# Allegro board PMOD2BNCSIMPLE_v1_04.brd
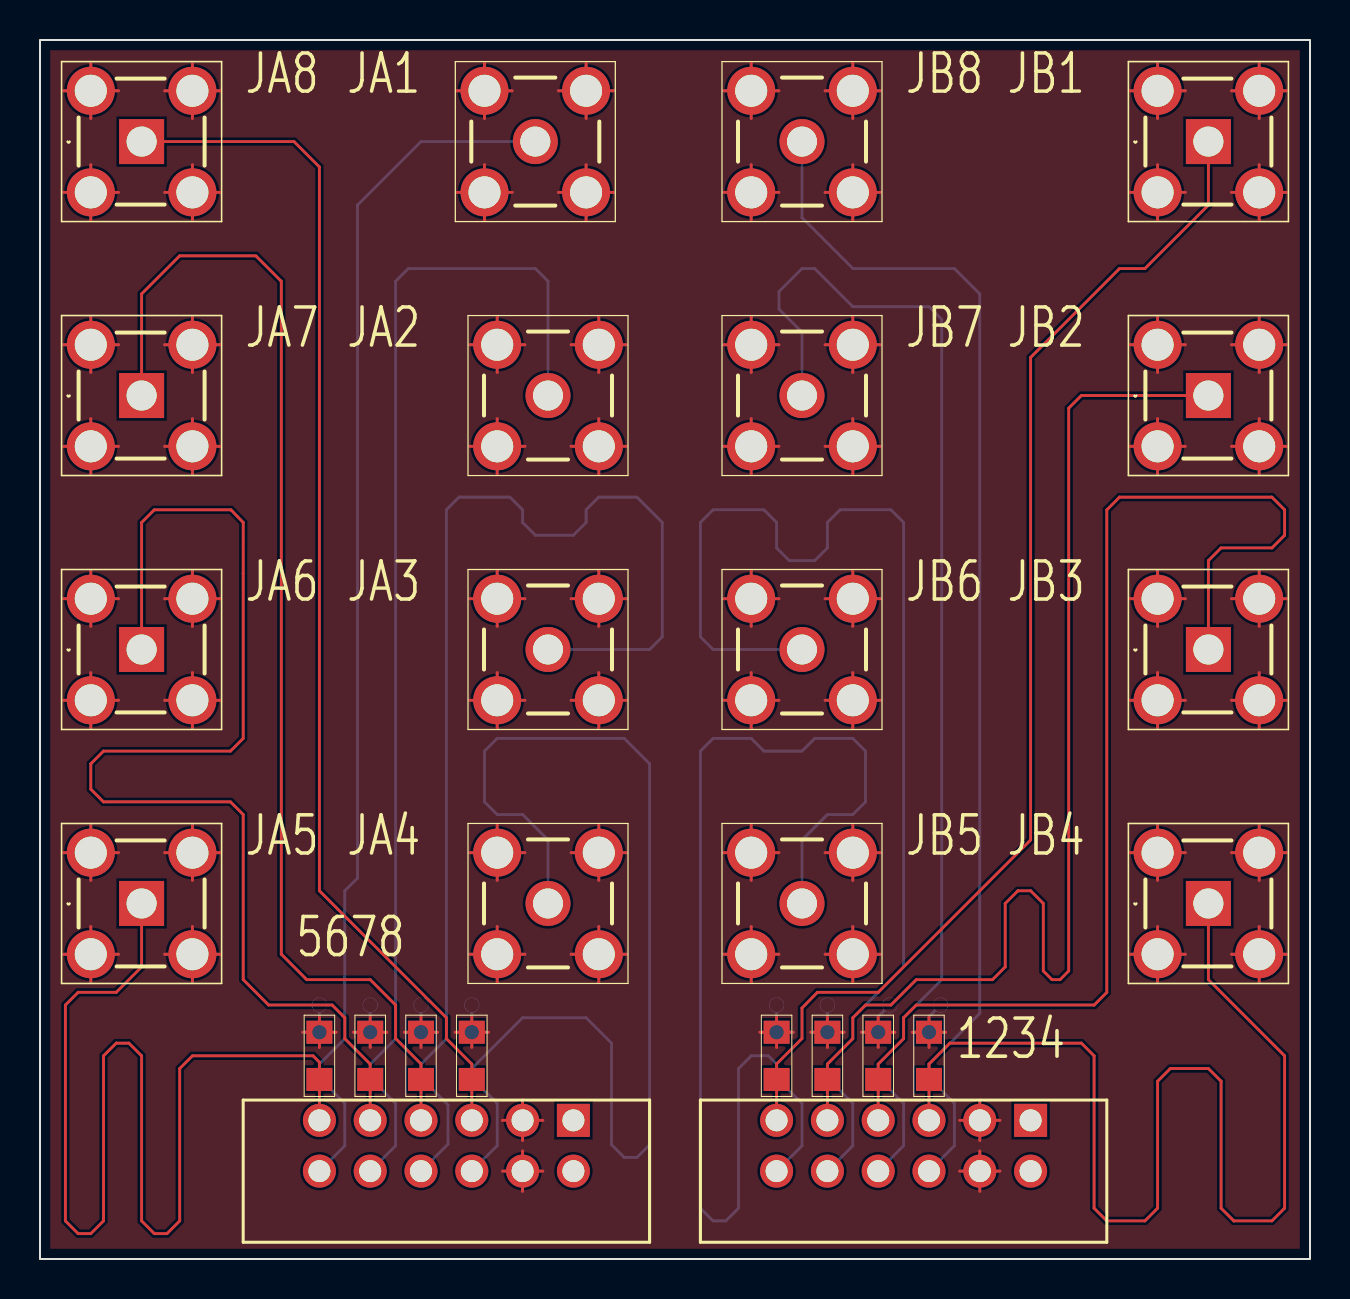
[diagram p0: board, top side]
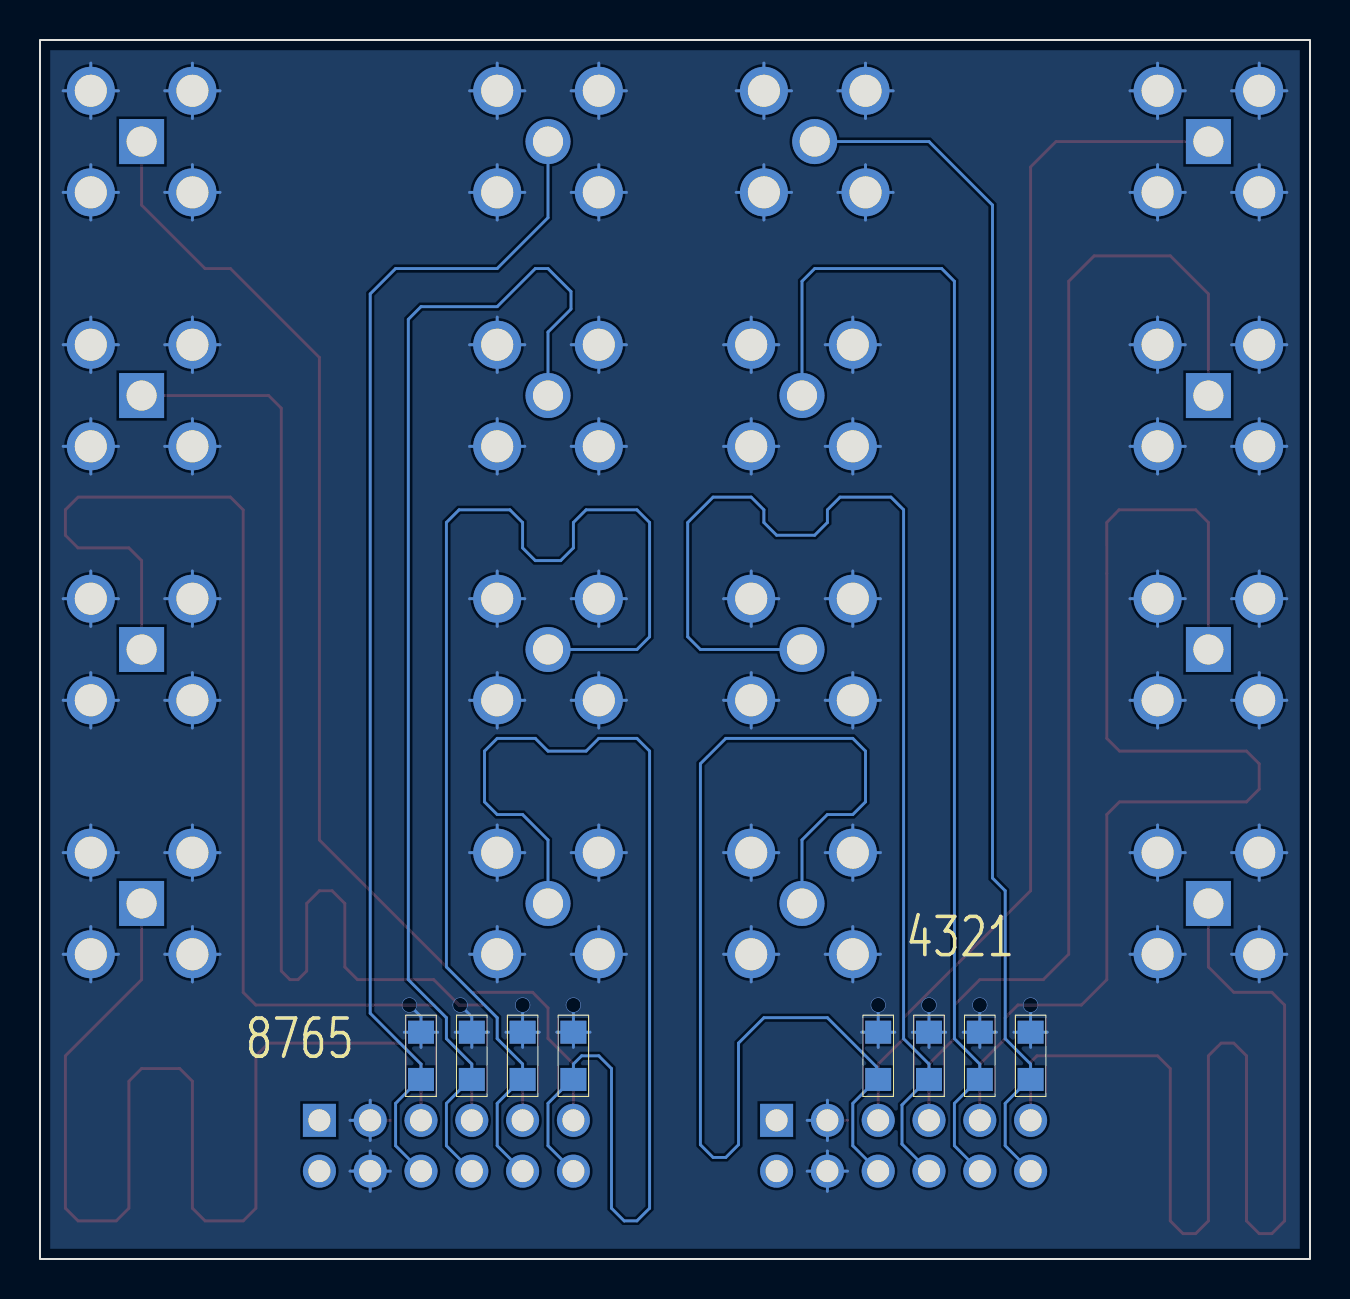
[diagram p1: board, bottom side, seen from below]

Outline 63.5 x 60.96 mm; copper layers: TOP, GND1, GND2, BOTTOM. Coordinates in mm from the lower left corner of the outline.
Outline path: rectangle 0,0 63.5,60.96

## Placement (name value [footprint] x y rotation side)
J1  71764_0114  [717640112]  10.16 0.84 180 top
J2  71764_0114  [717640112]  33.02 0.84 180 top
R1  -  [RES_0805]  21.59 10.16 90 top
R2  -  [RES_0805]  19.05 10.16 90 top
R3  -  [RES_0805]  16.51 10.16 90 top
R4  -  [RES_0805]  13.97 10.16 90 top
R5  -  [RES_0805]  13.97 10.16 90 bottom
R6  -  [RES_0805]  16.51 10.16 90 bottom
R7  -  [RES_0805]  19.05 10.16 90 bottom
R8  -  [RES_0805]  21.59 10.16 90 bottom
R9  -  [RES_0805]  44.45 10.16 90 top
R10  -  [RES_0805]  41.91 10.16 90 top
R11  -  [RES_0805]  39.37 10.16 90 top
R12  -  [RES_0805]  36.83 10.16 90 top
R13  -  [RES_0805]  36.83 10.16 90 bottom
R14  -  [RES_0805]  39.37 10.16 90 bottom
R15  -  [RES_0805]  41.91 10.16 90 bottom
R16  -  [RES_0805]  44.45 10.16 90 bottom
U1  -  [SMA-R-RA]  5.08 17.78 0 top
U2  -  [SMAFST_PCBN]  24.77 55.88 0 top
U3  -  [SMA-R-RA]  5.08 30.48 0 top
U4  -  [SMAFST_PCBN]  25.4 43.18 0 top
U5  -  [SMA-R-RA]  5.08 43.18 0 top
U6  -  [SMAFST_PCBN]  25.4 30.48 0 top
U7  -  [SMA-R-RA]  5.08 55.88 0 top
U8  -  [SMAFST_PCBN]  25.4 17.78 0 top
U9  -  [SMA-R-RA]  58.42 55.88 0 top
U10  -  [SMAFST_PCBN]  38.1 17.78 0 top
U11  -  [SMA-R-RA]  58.42 43.18 0 top
U12  -  [SMAFST_PCBN]  38.1 30.48 0 top
U13  -  [SMA-R-RA]  58.42 30.48 0 top
U14  -  [SMAFST_PCBN]  38.1 43.18 0 top
U15  -  [SMA-R-RA]  58.42 17.78 0 top
U16  -  [SMAFST_PCBN]  38.1 55.88 0 top

## Library data of the parts
J1 J2 = 71764_0114
R1-R16 = RES_0805
U1 U3 U5 U7 U9 U11 U13 U15 = SMA-R-RA
U2 U4 U6 U8 U10 U12 U14 U16 = SMAFST_PCBN

## Footprints (pads in the part's own frame, mm; a bottom-side part is the same pattern mirrored in y, then rotated)
717640112
  rect 1.651x1.651 hole 1.1: 1(-16.51,-6.096)
  round 1.651 hole 1.1: 2(-16.51,-3.556) 3(-13.97,-6.096) 4(-13.97,-3.556) 5(-11.43,-6.096) 6(-11.43,-3.556) 7(-8.89,-6.096) 8(-8.89,-3.556) 9(-6.35,-6.096) 10(-6.35,-3.556) 11(-3.81,-6.096) 12(-3.81,-3.556)
RES_0805
  rect 1.151x1.3 smd: 1(1.181,0) 2(-1.181,0)
SMA-R-RA
  rect 2.25x2.25 hole 1.501: 1(0,0)
  round 2.4 hole 1.6: 2(-2.54,2.54) 3(-2.54,-2.54) 4(2.54,-2.54) 5(2.54,2.54)
SMAFST_PCBN
  round 2.25 hole 1.501: 1(0,0)
  round 2.4 hole 1.6: 2(-2.54,-2.54) 3(2.54,-2.54) 4(2.54,2.54) 5(-2.54,2.54)

## Nets
GND: J1.3 J1.4 J2.3 J2.4 R1.1 R2.1 R3.1 R4.1 R5.1 R6.1 R7.1 R8.1 R9.1 R10.1 R11.1 R12.1 R13.1 R14.1 R15.1 R16.1 U1.2 U1.3 U1.4 U1.5 U2.2 U2.3 U2.4 U2.5 U3.2 U3.3 U3.4 U3.5 U4.2 U4.3 U4.4 U4.5 U5.2 U5.3 U5.4 U5.5 U6.2 U6.3 U6.4 U6.5 U7.2 U7.3 U7.4 U7.5 U8.2 U8.3 U8.4 U8.5 U9.2 U9.3 U9.4 U9.5 U10.2 U10.3 U10.4 U10.5 U11.2 U11.3 U11.4 U11.5 U12.2 U12.3 U12.4 U12.5 U13.2 U13.3 U13.4 U13.5 U14.2 U14.3 U14.4 U14.5 U15.2 U15.3 U15.4 U15.5 U16.2 U16.3 U16.4 U16.5
N17882: J1.11 R4.2 U1.1
N17894: J1.9 R3.2 U3.1
N17906: J1.7 R2.2 U5.1
N17918: J1.5 R1.2 U7.1
N17930: J1.12 R5.2 U2.1
N17948: J1.10 R6.2 U4.1
N17973: J1.8 R7.2 U6.1
N17998: J1.6 R8.2 U8.1
N19655: J2.11 R12.2 U9.1
N19661: J2.9 R11.2 U11.1
N19667: J2.7 R10.2 U13.1
N19673: J2.5 R9.2 U15.1
N19679: J2.12 R13.2 U10.1
N19687: J2.10 R14.2 U12.1
N19697: J2.8 R15.2 U14.1
N19707: J2.6 R16.2 U16.1

Pads without a net: J1 1 2; J2 1 2

## Via types
v1: diameter 0.762, hole 0.711, TOP to GND1, 8 vias
v2: diameter 0.762, hole 0.711, GND2 to BOTTOM, 8 vias

## Routing (per net, layer and track width the routed paths; a pad name or vN(x,y) marks a point on that pad's centre or on a via; arc(x,y) is an arc through that point)
GND: length 1536.3
  TOP w0.145: 1.16,53.34 U7.3 ; U7.3 3.92,53.34 ; U7.3 2.54,51.96 ; U7.3 2.54,54.72 ; U9.3 55.88,54.72 ; U9.3 54.5,53.34 ; U9.3 57.26,53.34 ; U9.3 55.88,51.96 ; U8.2 24.24,15.24 ; U8.2 21.48,15.24 ; U8.2 22.86,13.86 ; U8.2 22.86,16.62 ; U4.2 24.24,40.64 ; U4.2 22.86,42.02 ; U4.2 22.86,39.26 ; U4.2 21.48,40.64 ; 60.96,44.34 U11.5 ; U11.5 62.34,45.72 ; U11.5 60.96,47.1 ; U11.5 59.58,45.72 ; U9.5 62.34,58.42 ; U9.5 59.58,58.42 ; U9.5 60.96,57.04 ; U9.5 60.96,59.8 ; 34.18,40.64 U14.2 ; U14.2 35.56,42.02 ; U14.2 35.56,39.26 ; U14.2 36.94,40.64 ; 7.62,18.94 U1.5 ; U1.5 9,20.32 ; U1.5 7.62,21.7 ; U1.5 6.24,20.32 ; U2.5 23.61,58.42 ; U2.5 22.23,57.04 ; U2.5 20.84,58.42 ; U2.5 22.23,59.8 ; 54.5,20.32 U15.2 ; U15.2 55.88,21.7 ; U15.2 55.88,18.94 ; U15.2 57.26,20.32 ; 19.05,10.58 v1(19.05,11.34) ; v1(19.05,11.34) 19.05,12.1 ; v1(19.05,11.34) 18.22,11.34 ; v1(19.05,11.34) 19.88,11.34 ; v1(21.59,11.34) 21.59,12.1 ; v1(21.59,11.34) 22.42,11.34 ; v1(21.59,11.34) 21.59,10.58 ; v1(21.59,11.34) 20.76,11.34 ; 20.84,53.34 U2.2 ; U2.2 22.23,54.72 ; U2.2 23.61,53.34 ; U2.2 22.23,51.96 ; U5.4 7.62,42.02 ; U5.4 9,40.64 ; U5.4 6.24,40.64 ; U5.4 7.62,39.26 ; 54.5,33.02 U13.2 ; U13.2 55.88,34.4 ; U13.2 55.88,31.64 ; U13.2 57.26,33.02 ; U13.4 60.96,29.32 ; U13.4 59.58,27.94 ; U13.4 60.96,26.56 ; U13.4 62.34,27.94 ; 27.94,31.64 U6.4 ; U6.4 27.94,34.4 ; U6.4 29.32,33.02 ; U6.4 26.56,33.02 ; 7.62,51.96 U7.4 ; U7.4 6.24,53.34 ; U7.4 7.62,54.72 ; U7.4 9,53.34 ; 27.3,51.96 U2.3 ; U2.3 25.92,53.34 ; U2.3 28.69,53.34 ; U2.3 27.3,54.72 ; U3.3 2.54,29.32 ; U3.3 3.92,27.94 ; U3.3 2.54,26.56 ; U3.3 1.16,27.94 ; 40.64,31.64 U12.4 ; U12.4 40.64,34.4 ; U12.4 39.26,33.02 ; U12.4 42.02,33.02 ; 39.26,45.72 U14.4 ; U14.4 42.02,45.72 ; U14.4 40.64,44.34 ; U14.4 40.64,47.1 ; 40.64,39.26 U14.3 ; U14.3 39.26,40.64 ; U14.3 42.02,40.64 ; U14.3 40.64,42.02 ; U6.2 22.86,29.32 ; U6.2 24.24,27.94 ; U6.2 21.48,27.94 ; U6.2 22.86,26.56 ; U9.4 62.34,53.34 ; U9.4 59.58,53.34 ; U9.4 60.96,51.96 ; U9.4 60.96,54.72 ; 54.5,58.42 U9.2 ; U9.2 57.26,58.42 ; U9.2 55.88,59.8 ; U9.2 55.88,57.04 ; U10.2 36.94,15.24 ; U10.2 35.56,16.62 ; U10.2 35.56,13.86 ; U10.2 34.18,15.24 ; U15.5 60.96,21.7 ; U15.5 62.34,20.32 ; U15.5 60.96,18.94 ; U15.5 59.58,20.32 ; U16.3 40.64,54.72 ; U16.3 42.02,53.34 ; U16.3 39.26,53.34 ; U16.3 40.64,51.96 ; 1.16,20.32 U1.2 ; U1.2 2.54,21.7 ; U1.2 2.54,18.94 ; U1.2 3.92,20.32 ; U8.4 29.32,20.32 ; U8.4 27.94,21.7 ; U8.4 27.94,18.94 ; U8.4 26.56,20.32 ; J2.3 46.99,7.94 ; J2.3 45.98,6.93 ; J2.3 48,6.93 ; J2.3 46.99,5.93 ; 39.26,15.24 U10.3 ; U10.3 40.64,13.86 ; U10.3 40.64,16.62 ; U10.3 42.02,15.24 ; 27.94,13.86 U8.3 ; U8.3 29.32,15.24 ; U8.3 27.94,16.62 ; U8.3 26.56,15.24 ; 1.16,40.64 U5.3 ; U5.3 2.54,42.02 ; U5.3 2.54,39.26 ; U5.3 3.92,40.64 ; U15.4 62.34,15.24 ; U15.4 60.96,16.62 ; U15.4 59.58,15.24 ; U15.4 60.96,13.86 ; 36.83,10.58 v1(36.83,11.34) ; v1(36.83,11.34) 37.66,11.34 ; v1(36.83,11.34) 36.83,12.1 ; v1(36.83,11.34) 36,11.34 ; 21.48,20.32 U8.5 ; U8.5 22.86,21.7 ; U8.5 22.86,18.94 ; U8.5 24.24,20.32 ; U6.5 22.86,34.4 ; U6.5 21.48,33.02 ; U6.5 24.24,33.02 ; U6.5 22.86,31.64 ; 54.5,45.72 U11.2 ; U11.2 55.88,44.34 ; U11.2 57.26,45.72 ; U11.2 55.88,47.1 ; 35.56,31.64 U12.5 ; U12.5 36.94,33.02 ; U12.5 34.18,33.02 ; U12.5 35.56,34.4 ; 1.16,33.02 U3.2 ; U3.2 2.54,31.64 ; U3.2 2.54,34.4 ; U3.2 3.92,33.02 ; 6.24,33.02 U3.5 ; U3.5 7.62,34.4 ; U3.5 9,33.02 ; U3.5 7.62,31.64 ; U5.2 3.92,45.72 ; U5.2 1.16,45.72 ; U5.2 2.54,47.1 ; U5.2 2.54,44.34 ; U13.3 57.26,27.94 ; U13.3 54.5,27.94 ; U13.3 55.88,29.32 ; U13.3 55.88,26.56 ; U7.2 2.54,59.8 ; U7.2 3.92,58.42 ; U7.2 1.16,58.42 ; U7.2 2.54,57.04 ; 40.64,18.94 U10.4 ; U10.4 40.64,21.7 ; U10.4 42.02,20.32 ; U10.4 39.26,20.32 ; U4.5 24.24,45.72 ; U4.5 21.48,45.72 ; U4.5 22.86,44.34 ; U4.5 22.86,47.1 ; 13.97,10.58 v1(13.97,11.34) ; v1(13.97,11.34) 13.97,12.1 ; v1(13.97,11.34) 14.8,11.34 ; v1(13.97,11.34) 13.14,11.34 ; v1(44.45,11.34) 44.45,12.1 ; v1(44.45,11.34) 45.28,11.34 ; v1(44.45,11.34) 43.62,11.34 ; v1(44.45,11.34) 44.45,10.58 ; v1(16.51,11.34) 16.51,12.1 ; v1(16.51,11.34) 15.68,11.34 ; v1(16.51,11.34) 16.51,10.58 ; v1(16.51,11.34) 17.34,11.34 ; 7.62,13.86 U1.4 ; U1.4 9,15.24 ; U1.4 6.24,15.24 ; U1.4 7.62,16.62 ; 24.13,5.93 J1.3 ; J1.3 24.13,7.94 ; J1.3 25.14,6.93 ; J1.3 23.12,6.93 ; J2.4 48,4.39 ; J2.4 46.99,5.4 ; J2.4 45.98,4.39 ; J2.4 46.99,3.39 ; U13.5 60.96,34.4 ; U13.5 62.34,33.02 ; U13.5 60.96,31.64 ; U13.5 59.58,33.02 ; 7.62,26.56 U3.4 ; U3.4 6.24,27.94 ; U3.4 9,27.94 ; U3.4 7.62,29.32 ; 6.24,58.42 U7.5 ; U7.5 7.62,57.04 ; U7.5 7.62,59.8 ; U7.5 9,58.42 ; U16.4 42.02,58.42 ; U16.4 40.64,57.04 ; U16.4 40.64,59.8 ; U16.4 39.26,58.42 ; U5.5 9,45.72 ; U5.5 7.62,44.34 ; U5.5 6.24,45.72 ; U5.5 7.62,47.1 ; U4.3 27.94,42.02 ; U4.3 27.94,39.26 ; U4.3 29.32,40.64 ; U4.3 26.56,40.64 ; U16.5 36.94,58.42 ; U16.5 34.18,58.42 ; U16.5 35.56,57.04 ; U16.5 35.56,59.8 ; 41.91,10.58 v1(41.91,11.34) ; v1(41.91,11.34) 41.08,11.34 ; v1(41.91,11.34) 41.91,12.1 ; v1(41.91,11.34) 42.74,11.34 ; U10.5 35.56,21.7 ; U10.5 35.56,18.94 ; U10.5 36.94,20.32 ; U10.5 34.18,20.32 ; 25.92,58.42 U2.4 ; U2.4 27.3,57.04 ; U2.4 28.69,58.42 ; U2.4 27.3,59.8 ; 38.54,11.34 v1(39.37,11.34) ; v1(39.37,11.34) 39.37,12.1 ; v1(39.37,11.34) 39.37,10.58 ; v1(39.37,11.34) 40.2,11.34 ; U15.3 55.88,16.62 ; U15.3 57.26,15.24 ; U15.3 55.88,13.86 ; U15.3 54.5,15.24 ; U6.3 29.32,27.94 ; U6.3 27.94,26.56 ; U6.3 27.94,29.32 ; U6.3 26.56,27.94 ; 34.18,27.94 U12.2 ; U12.2 35.56,26.56 ; U12.2 35.56,29.32 ; U12.2 36.94,27.94 ; J1.4 24.13,5.4 ; J1.4 24.13,3.39 ; J1.4 23.12,4.39 ; J1.4 25.14,4.39 ; 34.18,53.34 U16.2 ; U16.2 35.56,51.96 ; U16.2 36.94,53.34 ; U16.2 35.56,54.72 ; U4.4 29.32,45.72 ; U4.4 27.94,44.34 ; U4.4 27.94,47.1 ; U4.4 26.56,45.72 ; U1.3 3.92,15.24 ; U1.3 1.16,15.24 ; U1.3 2.54,13.86 ; U1.3 2.54,16.62 ; 40.64,26.56 U12.3 ; U12.3 42.02,27.94 ; U12.3 40.64,29.32 ; U12.3 39.26,27.94 ; U14.5 36.94,45.72 ; U14.5 35.56,44.34 ; U14.5 35.56,47.1 ; U14.5 34.18,45.72 ; 59.58,40.64 U11.4 ; U11.4 60.96,39.26 ; U11.4 60.96,42.02 ; U11.4 62.34,40.64 ; 55.88,39.26 U11.3 ; U11.3 54.5,40.64 ; U11.3 57.26,40.64 ; U11.3 55.88,42.02
  GND1 w0.145: 59.58,45.72 U11.5 ; U11.5 62.34,45.72 ; U11.5 60.96,44.34 ; U11.5 60.96,47.1 ; 6.24,40.64 U5.4 ; U5.4 9,40.64 ; U5.4 7.62,42.02 ; U5.4 7.62,39.26 ; U6.3 29.32,27.94 ; U6.3 27.94,29.32 ; U6.3 27.94,26.56 ; U6.3 26.56,27.94 ; U8.5 22.86,21.7 ; U8.5 22.86,18.94 ; U8.5 24.24,20.32 ; U8.5 21.48,20.32 ; 6.24,33.02 U3.5 ; U3.5 7.62,31.64 ; U3.5 7.62,34.4 ; U3.5 9,33.02 ; U16.4 40.64,59.8 ; U16.4 39.26,58.42 ; U16.4 42.02,58.42 ; U16.4 40.64,57.04 ; 27.94,44.34 U4.4 ; U4.4 26.56,45.72 ; U4.4 29.32,45.72 ; U4.4 27.94,47.1 ; 6.24,20.32 U1.5 ; U1.5 7.62,18.94 ; U1.5 9,20.32 ; U1.5 7.62,21.7 ; U14.2 36.94,40.64 ; U14.2 35.56,39.26 ; U14.2 35.56,42.02 ; U14.2 34.18,40.64 ; 59.58,40.64 U11.4 ; U11.4 60.96,39.26 ; U11.4 62.34,40.64 ; U11.4 60.96,42.02 ; 26.56,20.32 U8.4 ; U8.4 27.94,18.94 ; U8.4 29.32,20.32 ; U8.4 27.94,21.7 ; U5.5 7.62,47.1 ; U5.5 9,45.72 ; U5.5 6.24,45.72 ; U5.5 7.62,44.34 ; U12.4 42.02,33.02 ; U12.4 40.64,34.4 ; U12.4 40.64,31.64 ; U12.4 39.26,33.02 ; 54.5,58.42 U9.2 ; U9.2 57.26,58.42 ; U9.2 55.88,57.04 ; U9.2 55.88,59.8 ; 46.99,5.93 J2.3 ; J2.3 46.99,7.94 ; J2.3 45.98,6.93 ; J2.3 48,6.93 ; 60.96,57.04 U9.5 ; U9.5 62.34,58.42 ; U9.5 60.96,59.8 ; U9.5 59.58,58.42 ; 24.13,3.39 J1.4 ; J1.4 23.12,4.39 ; J1.4 24.13,5.4 ; J1.4 25.14,4.39 ; U16.3 42.02,53.34 ; U16.3 39.26,53.34 ; U16.3 40.64,54.72 ; U16.3 40.64,51.96 ; U2.5 23.61,58.42 ; U2.5 20.84,58.42 ; U2.5 22.23,57.04 ; U2.5 22.23,59.8 ; U15.2 57.26,20.32 ; U15.2 55.88,21.7 ; U15.2 55.88,18.94 ; U15.2 54.5,20.32 ; 6.24,58.42 U7.5 ; U7.5 7.62,59.8 ; U7.5 9,58.42 ; U7.5 7.62,57.04 ; U2.3 27.3,54.72 ; U2.3 25.92,53.34 ; U2.3 27.3,51.96 ; U2.3 28.69,53.34 ; U14.5 35.56,47.1 ; U14.5 34.18,45.72 ; U14.5 35.56,44.34 ; U14.5 36.94,45.72 ; 59.58,53.34 U9.4 ; U9.4 62.34,53.34 ; U9.4 60.96,54.72 ; U9.4 60.96,51.96 ; U8.3 29.32,15.24 ; U8.3 27.94,13.86 ; U8.3 26.56,15.24 ; U8.3 27.94,16.62 ; 54.5,15.24 U15.3 ; U15.3 57.26,15.24 ; U15.3 55.88,13.86 ; U15.3 55.88,16.62 ; U14.4 42.02,45.72 ; U14.4 40.64,44.34 ; U14.4 40.64,47.1 ; U14.4 39.26,45.72 ; 2.54,13.86 U1.3 ; U1.3 2.54,16.62 ; U1.3 3.92,15.24 ; U1.3 1.16,15.24 ; U3.3 2.54,29.32 ; U3.3 1.16,27.94 ; U3.3 3.92,27.94 ; U3.3 2.54,26.56 ; U2.2 22.23,54.72 ; U2.2 22.23,51.96 ; U2.2 23.61,53.34 ; U2.2 20.84,53.34 ; 35.56,31.64 U12.5 ; U12.5 36.94,33.02 ; U12.5 34.18,33.02 ; U12.5 35.56,34.4 ; U8.2 22.86,16.62 ; U8.2 24.24,15.24 ; U8.2 22.86,13.86 ; U8.2 21.48,15.24 ; 26.56,33.02 U6.4 ; U6.4 27.94,34.4 ; U6.4 29.32,33.02 ; U6.4 27.94,31.64 ; 22.86,39.26 U4.2 ; U4.2 24.24,40.64 ; U4.2 21.48,40.64 ; U4.2 22.86,42.02 ; 22.86,44.34 U4.5 ; U4.5 21.48,45.72 ; U4.5 24.24,45.72 ; U4.5 22.86,47.1 ; U15.4 62.34,15.24 ; U15.4 60.96,16.62 ; U15.4 60.96,13.86 ; U15.4 59.58,15.24 ; U11.3 57.26,40.64 ; U11.3 54.5,40.64 ; U11.3 55.88,42.02 ; U11.3 55.88,39.26 ; 6.24,15.24 U1.4 ; U1.4 7.62,13.86 ; U1.4 7.62,16.62 ; U1.4 9,15.24 ; U5.3 3.92,40.64 ; U5.3 2.54,39.26 ; U5.3 1.16,40.64 ; U5.3 2.54,42.02 ; U6.5 24.24,33.02 ; U6.5 21.48,33.02 ; U6.5 22.86,31.64 ; U6.5 22.86,34.4 ; 39.26,27.94 U12.3 ; U12.3 42.02,27.94 ; U12.3 40.64,26.56 ; U12.3 40.64,29.32 ; 55.88,51.96 U9.3 ; U9.3 54.5,53.34 ; U9.3 57.26,53.34 ; U9.3 55.88,54.72 ; 7.62,51.96 U7.4 ; U7.4 6.24,53.34 ; U7.4 7.62,54.72 ; U7.4 9,53.34 ; 39.26,20.32 U10.4 ; U10.4 42.02,20.32 ; U10.4 40.64,18.94 ; U10.4 40.64,21.7 ; U11.2 57.26,45.72 ; U11.2 55.88,47.1 ; U11.2 55.88,44.34 ; U11.2 54.5,45.72 ; 54.5,33.02 U13.2 ; U13.2 55.88,31.64 ; U13.2 57.26,33.02 ; U13.2 55.88,34.4 ; U3.2 2.54,34.4 ; U3.2 3.92,33.02 ; U3.2 2.54,31.64 ; U3.2 1.16,33.02 ; U13.5 60.96,34.4 ; U13.5 60.96,31.64 ; U13.5 62.34,33.02 ; U13.5 59.58,33.02 ; 34.18,15.24 U10.2 ; U10.2 36.94,15.24 ; U10.2 35.56,13.86 ; U10.2 35.56,16.62 ; 25.92,58.42 U2.4 ; U2.4 27.3,57.04 ; U2.4 28.69,58.42 ; U2.4 27.3,59.8 ; U12.2 36.94,27.94 ; U12.2 35.56,26.56 ; U12.2 34.18,27.94 ; U12.2 35.56,29.32 ; U16.5 35.56,59.8 ; U16.5 34.18,58.42 ; U16.5 35.56,57.04 ; U16.5 36.94,58.42 ; J2.4 48,4.39 ; J2.4 46.99,3.39 ; J2.4 46.99,5.4 ; J2.4 45.98,4.39 ; U7.2 3.92,58.42 ; U7.2 1.16,58.42 ; U7.2 2.54,59.8 ; U7.2 2.54,57.04 ; 2.54,18.94 U1.2 ; U1.2 1.16,20.32 ; U1.2 2.54,21.7 ; U1.2 3.92,20.32 ; 40.64,39.26 U14.3 ; U14.3 40.64,42.02 ; U14.3 39.26,40.64 ; U14.3 42.02,40.64 ; J1.3 24.13,7.94 ; J1.3 25.14,6.93 ; J1.3 23.12,6.93 ; J1.3 24.13,5.93 ; U4.3 29.32,40.64 ; U4.3 27.94,39.26 ; U4.3 26.56,40.64 ; U4.3 27.94,42.02 ; 54.5,27.94 U13.3 ; U13.3 55.88,26.56 ; U13.3 55.88,29.32 ; U13.3 57.26,27.94 ; U10.3 42.02,15.24 ; U10.3 40.64,16.62 ; U10.3 39.26,15.24 ; U10.3 40.64,13.86 ; 21.48,27.94 U6.2 ; U6.2 22.86,26.56 ; U6.2 22.86,29.32 ; U6.2 24.24,27.94 ; U10.5 35.56,21.7 ; U10.5 36.94,20.32 ; U10.5 34.18,20.32 ; U10.5 35.56,18.94 ; U15.5 60.96,21.7 ; U15.5 60.96,18.94 ; U15.5 62.34,20.32 ; U15.5 59.58,20.32 ; U5.2 3.92,45.72 ; U5.2 2.54,44.34 ; U5.2 1.16,45.72 ; U5.2 2.54,47.1 ; 60.96,26.56 U13.4 ; U13.4 60.96,29.32 ; U13.4 62.34,27.94 ; U13.4 59.58,27.94 ; U3.4 9,27.94 ; U3.4 7.62,29.32 ; U3.4 6.24,27.94 ; U3.4 7.62,26.56 ; U7.3 2.54,54.72 ; U7.3 3.92,53.34 ; U7.3 1.16,53.34 ; U7.3 2.54,51.96 ; 34.18,53.34 U16.2 ; U16.2 36.94,53.34 ; U16.2 35.56,54.72 ; U16.2 35.56,51.96
  GND2 w0.145: U14.3 42.02,40.64 ; U14.3 40.64,42.02 ; U14.3 39.26,40.64 ; U14.3 40.64,39.26 ; U6.2 24.24,27.94 ; U6.2 22.86,29.32 ; U6.2 21.48,27.94 ; U6.2 22.86,26.56 ; 35.56,44.34 U14.5 ; U14.5 34.18,45.72 ; U14.5 35.56,47.1 ; U14.5 36.94,45.72 ; U5.4 9,40.64 ; U5.4 7.62,42.02 ; U5.4 6.24,40.64 ; U5.4 7.62,39.26 ; 39.26,33.02 U12.4 ; U12.4 42.02,33.02 ; U12.4 40.64,31.64 ; U12.4 40.64,34.4 ; 60.96,26.56 U13.4 ; U13.4 59.58,27.94 ; U13.4 60.96,29.32 ; U13.4 62.34,27.94 ; U16.4 40.64,59.8 ; U16.4 42.02,58.42 ; U16.4 40.64,57.04 ; U16.4 39.26,58.42 ; 22.23,57.04 U2.5 ; U2.5 22.23,59.8 ; U2.5 23.61,58.42 ; U2.5 20.84,58.42 ; 35.56,18.94 U10.5 ; U10.5 36.94,20.32 ; U10.5 35.56,21.7 ; U10.5 34.18,20.32 ; 2.54,26.56 U3.3 ; U3.3 2.54,29.32 ; U3.3 3.92,27.94 ; U3.3 1.16,27.94 ; 7.62,13.86 U1.4 ; U1.4 6.24,15.24 ; U1.4 9,15.24 ; U1.4 7.62,16.62 ; 54.5,15.24 U15.3 ; U15.3 55.88,16.62 ; U15.3 55.88,13.86 ; U15.3 57.26,15.24 ; 59.58,53.34 U9.4 ; U9.4 60.96,51.96 ; U9.4 62.34,53.34 ; U9.4 60.96,54.72 ; J1.4 24.13,5.4 ; J1.4 25.14,4.39 ; J1.4 23.12,4.39 ; J1.4 24.13,3.39 ; U16.3 42.02,53.34 ; U16.3 40.64,51.96 ; U16.3 40.64,54.72 ; U16.3 39.26,53.34 ; U7.4 7.62,54.72 ; U7.4 6.24,53.34 ; U7.4 9,53.34 ; U7.4 7.62,51.96 ; U12.2 35.56,29.32 ; U12.2 36.94,27.94 ; U12.2 35.56,26.56 ; U12.2 34.18,27.94 ; U7.3 3.92,53.34 ; U7.3 2.54,51.96 ; U7.3 1.16,53.34 ; U7.3 2.54,54.72 ; 7.62,57.04 U7.5 ; U7.5 9,58.42 ; U7.5 6.24,58.42 ; U7.5 7.62,59.8 ; U1.5 9,20.32 ; U1.5 7.62,21.7 ; U1.5 7.62,18.94 ; U1.5 6.24,20.32 ; 6.24,27.94 U3.4 ; U3.4 9,27.94 ; U3.4 7.62,26.56 ; U3.4 7.62,29.32 ; 59.58,58.42 U9.5 ; U9.5 60.96,59.8 ; U9.5 60.96,57.04 ; U9.5 62.34,58.42 ; 27.3,51.96 U2.3 ; U2.3 28.69,53.34 ; U2.3 25.92,53.34 ; U2.3 27.3,54.72 ; 59.58,33.02 U13.5 ; U13.5 62.34,33.02 ; U13.5 60.96,31.64 ; U13.5 60.96,34.4 ; U13.3 57.26,27.94 ; U13.3 54.5,27.94 ; U13.3 55.88,26.56 ; U13.3 55.88,29.32 ; U15.2 55.88,21.7 ; U15.2 55.88,18.94 ; U15.2 57.26,20.32 ; U15.2 54.5,20.32 ; 2.54,18.94 U1.2 ; U1.2 1.16,20.32 ; U1.2 3.92,20.32 ; U1.2 2.54,21.7 ; U12.3 40.64,29.32 ; U12.3 39.26,27.94 ; U12.3 40.64,26.56 ; U12.3 42.02,27.94 ; U11.4 60.96,42.02 ; U11.4 60.96,39.26 ; U11.4 59.58,40.64 ; U11.4 62.34,40.64 ; J2.3 48,6.93 ; J2.3 46.99,5.93 ; J2.3 46.99,7.94 ; J2.3 45.98,6.93 ; 22.86,18.94 U8.5 ; U8.5 21.48,20.32 ; U8.5 24.24,20.32 ; U8.5 22.86,21.7 ; U3.5 9,33.02 ; U3.5 6.24,33.02 ; U3.5 7.62,34.4 ; U3.5 7.62,31.64 ; U11.3 57.26,40.64 ; U11.3 55.88,39.26 ; U11.3 54.5,40.64 ; U11.3 55.88,42.02 ; U6.4 27.94,34.4 ; U6.4 29.32,33.02 ; U6.4 27.94,31.64 ; U6.4 26.56,33.02 ; U2.2 23.61,53.34 ; U2.2 22.23,54.72 ; U2.2 20.84,53.34 ; U2.2 22.23,51.96 ; U15.4 62.34,15.24 ; U15.4 59.58,15.24 ; U15.4 60.96,13.86 ; U15.4 60.96,16.62 ; U2.4 27.3,59.8 ; U2.4 27.3,57.04 ; U2.4 28.69,58.42 ; U2.4 25.92,58.42 ; U12.5 36.94,33.02 ; U12.5 35.56,31.64 ; U12.5 35.56,34.4 ; U12.5 34.18,33.02 ; 55.88,57.04 U9.2 ; U9.2 55.88,59.8 ; U9.2 54.5,58.42 ; U9.2 57.26,58.42 ; U13.2 57.26,33.02 ; U13.2 55.88,34.4 ; U13.2 55.88,31.64 ; U13.2 54.5,33.02 ; 54.5,45.72 U11.2 ; U11.2 57.26,45.72 ; U11.2 55.88,44.34 ; U11.2 55.88,47.1 ; 40.64,13.86 U10.3 ; U10.3 39.26,15.24 ; U10.3 42.02,15.24 ; U10.3 40.64,16.62 ; 2.54,44.34 U5.2 ; U5.2 2.54,47.1 ; U5.2 1.16,45.72 ; U5.2 3.92,45.72 ; U11.5 60.96,47.1 ; U11.5 60.96,44.34 ; U11.5 59.58,45.72 ; U11.5 62.34,45.72 ; 2.54,57.04 U7.2 ; U7.2 3.92,58.42 ; U7.2 2.54,59.8 ; U7.2 1.16,58.42 ; U5.5 7.62,47.1 ; U5.5 7.62,44.34 ; U5.5 9,45.72 ; U5.5 6.24,45.72 ; U4.5 24.24,45.72 ; U4.5 22.86,44.34 ; U4.5 21.48,45.72 ; U4.5 22.86,47.1 ; U15.5 60.96,21.7 ; U15.5 59.58,20.32 ; U15.5 62.34,20.32 ; U15.5 60.96,18.94 ; J2.4 46.99,5.4 ; J2.4 46.99,3.39 ; J2.4 48,4.39 ; J2.4 45.98,4.39 ; 26.56,20.32 U8.4 ; U8.4 29.32,20.32 ; U8.4 27.94,21.7 ; U8.4 27.94,18.94 ; 21.48,33.02 U6.5 ; U6.5 24.24,33.02 ; U6.5 22.86,34.4 ; U6.5 22.86,31.64 ; U9.3 57.26,53.34 ; U9.3 54.5,53.34 ; U9.3 55.88,51.96 ; U9.3 55.88,54.72 ; 35.56,57.04 U16.5 ; U16.5 34.18,58.42 ; U16.5 35.56,59.8 ; U16.5 36.94,58.42 ; 34.18,15.24 U10.2 ; U10.2 36.94,15.24 ; U10.2 35.56,13.86 ; U10.2 35.56,16.62 ; 39.26,45.72 U14.4 ; U14.4 40.64,44.34 ; U14.4 40.64,47.1 ; U14.4 42.02,45.72 ; U4.3 27.94,42.02 ; U4.3 27.94,39.26 ; U4.3 26.56,40.64 ; U4.3 29.32,40.64 ; U3.2 3.92,33.02 ; U3.2 1.16,33.02 ; U3.2 2.54,34.4 ; U3.2 2.54,31.64 ; U14.2 36.94,40.64 ; U14.2 34.18,40.64 ; U14.2 35.56,42.02 ; U14.2 35.56,39.26 ; U10.4 40.64,21.7 ; U10.4 40.64,18.94 ; U10.4 39.26,20.32 ; U10.4 42.02,20.32 ; 2.54,39.26 U5.3 ; U5.3 2.54,42.02 ; U5.3 3.92,40.64 ; U5.3 1.16,40.64 ; 23.12,6.93 J1.3 ; J1.3 25.14,6.93 ; J1.3 24.13,7.94 ; J1.3 24.13,5.93 ; 34.18,53.34 U16.2 ; U16.2 35.56,54.72 ; U16.2 35.56,51.96 ; U16.2 36.94,53.34 ; 22.86,13.86 U8.2 ; U8.2 22.86,16.62 ; U8.2 21.48,15.24 ; U8.2 24.24,15.24 ; 26.56,45.72 U4.4 ; U4.4 27.94,44.34 ; U4.4 29.32,45.72 ; U4.4 27.94,47.1 ; U6.3 29.32,27.94 ; U6.3 26.56,27.94 ; U6.3 27.94,26.56 ; U6.3 27.94,29.32 ; 2.54,13.86 U1.3 ; U1.3 3.92,15.24 ; U1.3 1.16,15.24 ; U1.3 2.54,16.62 ; U4.2 24.24,40.64 ; U4.2 22.86,39.26 ; U4.2 21.48,40.64 ; U4.2 22.86,42.02 ; 26.56,15.24 U8.3 ; U8.3 27.94,13.86 ; U8.3 27.94,16.62 ; U8.3 29.32,15.24
  BOTTOM w0.145: 24.13,3.39 J1.4 ; J1.4 23.12,4.39 ; J1.4 24.13,5.4 ; J1.4 25.14,4.39 ; U11.5 62.34,45.72 ; U11.5 60.96,47.1 ; U11.5 60.96,44.34 ; U11.5 59.58,45.72 ; 54.5,58.42 U9.2 ; U9.2 57.26,58.42 ; U9.2 55.88,59.8 ; U9.2 55.88,57.04 ; 55.88,26.56 U13.3 ; U13.3 57.26,27.94 ; U13.3 55.88,29.32 ; U13.3 54.5,27.94 ; 26.56,27.94 U6.3 ; U6.3 27.94,29.32 ; U6.3 29.32,27.94 ; U6.3 27.94,26.56 ; 41.91,10.58 v1(41.91,11.34) ; v1(41.91,11.34) 41.91,12.12 v2(42.49,12.7) ; v1(41.91,11.34) 41.08,11.34 ; v1(41.91,11.34) 42.74,11.34 ; v1(21.59,11.34) v2(21.59,12.7) ; v1(21.59,11.34) 21.59,10.58 ; v1(21.59,11.34) 22.42,11.34 ; v1(21.59,11.34) 20.76,11.34 ; 60.96,13.86 U15.4 ; U15.4 62.34,15.24 ; U15.4 60.96,16.62 ; U15.4 59.58,15.24 ; 22.23,51.96 U2.2 ; U2.2 22.23,54.72 ; U2.2 20.84,53.34 ; U2.2 23.61,53.34 ; 15.68,11.34 v1(16.51,11.34) ; v1(16.51,11.34) 17.34,11.34 ; v1(16.51,11.34) 16.51,10.58 ; v1(16.51,11.34) v2(16.51,12.7) ; U8.4 29.32,20.32 ; U8.4 27.94,18.94 ; U8.4 27.94,21.7 ; U8.4 26.56,20.32 ; U11.4 60.96,42.02 ; U11.4 60.96,39.26 ; U11.4 59.58,40.64 ; U11.4 62.34,40.64 ; U7.2 2.54,59.8 ; U7.2 3.92,58.42 ; U7.2 1.16,58.42 ; U7.2 2.54,57.04 ; U7.5 9,58.42 ; U7.5 7.62,59.8 ; U7.5 6.24,58.42 ; U7.5 7.62,57.04 ; v1(39.37,11.34) 40.2,11.34 ; v1(39.37,11.34) 39.37,10.58 ; v1(39.37,11.34) v2(39.37,12.7) ; v1(39.37,11.34) 38.54,11.34 ; 1.16,40.64 U5.3 ; U5.3 3.92,40.64 ; U5.3 2.54,42.02 ; U5.3 2.54,39.26 ; U10.3 42.02,15.24 ; U10.3 39.26,15.24 ; U10.3 40.64,13.86 ; U10.3 40.64,16.62 ; 26.56,15.24 U8.3 ; U8.3 27.94,16.62 ; U8.3 27.94,13.86 ; U8.3 29.32,15.24 ; 39.26,20.32 U10.4 ; U10.4 40.64,21.7 ; U10.4 42.02,20.32 ; U10.4 40.64,18.94 ; 35.56,31.64 U12.5 ; U12.5 35.56,34.4 ; U12.5 36.94,33.02 ; U12.5 34.18,33.02 ; U4.4 29.32,45.72 ; U4.4 26.56,45.72 ; U4.4 27.94,44.34 ; U4.4 27.94,47.1 ; U3.5 7.62,34.4 ; U3.5 6.24,33.02 ; U3.5 7.62,31.64 ; U3.5 9,33.02 ; 35.56,18.94 U10.5 ; U10.5 36.94,20.32 ; U10.5 35.56,21.7 ; U10.5 34.18,20.32 ; 44.45,10.58 v1(44.45,11.34) ; v1(44.45,11.34) 44.45,12.12 v2(45.03,12.7) ; v1(44.45,11.34) 43.62,11.34 ; v1(44.45,11.34) 45.28,11.34 ; U16.3 40.64,54.72 ; U16.3 40.64,51.96 ; U16.3 39.26,53.34 ; U16.3 42.02,53.34 ; U2.4 27.3,59.8 ; U2.4 28.69,58.42 ; U2.4 27.3,57.04 ; U2.4 25.92,58.42 ; U8.2 22.86,16.62 ; U8.2 22.86,13.86 ; U8.2 24.24,15.24 ; U8.2 21.48,15.24 ; U12.2 35.56,29.32 ; U12.2 35.56,26.56 ; U12.2 36.94,27.94 ; U12.2 34.18,27.94 ; 1.16,45.72 U5.2 ; U5.2 3.92,45.72 ; U5.2 2.54,47.1 ; U5.2 2.54,44.34 ; U4.3 29.32,40.64 ; U4.3 26.56,40.64 ; U4.3 27.94,39.26 ; U4.3 27.94,42.02 ; 35.56,57.04 U16.5 ; U16.5 36.94,58.42 ; U16.5 35.56,59.8 ; U16.5 34.18,58.42 ; U11.2 57.26,45.72 ; U11.2 55.88,44.34 ; U11.2 55.88,47.1 ; U11.2 54.5,45.72 ; 7.62,44.34 U5.5 ; U5.5 7.62,47.1 ; U5.5 9,45.72 ; U5.5 6.24,45.72 ; U16.4 40.64,59.8 ; U16.4 40.64,57.04 ; U16.4 39.26,58.42 ; U16.4 42.02,58.42 ; U1.3 3.92,15.24 ; U1.3 1.16,15.24 ; U1.3 2.54,13.86 ; U1.3 2.54,16.62 ; 19.05,10.58 v1(19.05,11.34) ; v1(19.05,11.34) v2(19.05,12.7) ; v1(19.05,11.34) 18.22,11.34 ; v1(19.05,11.34) 19.88,11.34 ; U4.5 22.86,47.1 ; U4.5 24.24,45.72 ; U4.5 21.48,45.72 ; U4.5 22.86,44.34 ; 45.98,4.39 J2.4 ; J2.4 48,4.39 ; J2.4 46.99,5.4 ; J2.4 46.99,3.39 ; 27.94,31.64 U6.4 ; U6.4 27.94,34.4 ; U6.4 29.32,33.02 ; U6.4 26.56,33.02 ; 34.18,53.34 U16.2 ; U16.2 35.56,54.72 ; U16.2 35.56,51.96 ; U16.2 36.94,53.34 ; U3.4 9,27.94 ; U3.4 7.62,26.56 ; U3.4 6.24,27.94 ; U3.4 7.62,29.32 ; U15.5 62.34,20.32 ; U15.5 60.96,18.94 ; U15.5 60.96,21.7 ; U15.5 59.58,20.32 ; U10.2 35.56,16.62 ; U10.2 35.56,13.86 ; U10.2 34.18,15.24 ; U10.2 36.94,15.24 ; 2.54,18.94 U1.2 ; U1.2 2.54,21.7 ; U1.2 1.16,20.32 ; U1.2 3.92,20.32 ; 40.64,31.64 U12.4 ; U12.4 39.26,33.02 ; U12.4 42.02,33.02 ; U12.4 40.64,34.4 ; v1(36.83,11.34) v2(36.83,12.7) ; v1(36.83,11.34) 37.66,11.34 ; v1(36.83,11.34) 36,11.34 ; v1(36.83,11.34) 36.83,10.58 ; 34.18,45.72 U14.5 ; U14.5 35.56,44.34 ; U14.5 36.94,45.72 ; U14.5 35.56,47.1 ; v1(13.97,11.34) 14.8,11.34 ; v1(13.97,11.34) v2(13.97,12.7) ; v1(13.97,11.34) 13.97,10.58 ; v1(13.97,11.34) 13.14,11.34 ; 6.24,40.64 U5.4 ; U5.4 7.62,42.02 ; U5.4 9,40.64 ; U5.4 7.62,39.26 ; U6.5 24.24,33.02 ; U6.5 21.48,33.02 ; U6.5 22.86,34.4 ; U6.5 22.86,31.64 ; 6.24,20.32 U1.5 ; U1.5 7.62,21.7 ; U1.5 9,20.32 ; U1.5 7.62,18.94 ; U13.4 62.34,27.94 ; U13.4 60.96,29.32 ; U13.4 60.96,26.56 ; U13.4 59.58,27.94 ; U2.5 23.61,58.42 ; U2.5 22.23,57.04 ; U2.5 20.84,58.42 ; U2.5 22.23,59.8 ; U14.2 36.94,40.64 ; U14.2 35.56,39.26 ; U14.2 34.18,40.64 ; U14.2 35.56,42.02 ; U1.4 9,15.24 ; U1.4 6.24,15.24 ; U1.4 7.62,16.62 ; U1.4 7.62,13.86 ; 54.5,40.64 U11.3 ; U11.3 55.88,42.02 ; U11.3 57.26,40.64 ; U11.3 55.88,39.26 ; 2.54,51.96 U7.3 ; U7.3 1.16,53.34 ; U7.3 3.92,53.34 ; U7.3 2.54,54.72 ; 54.5,53.34 U9.3 ; U9.3 57.26,53.34 ; U9.3 55.88,51.96 ; U9.3 55.88,54.72 ; 55.88,13.86 U15.3 ; U15.3 57.26,15.24 ; U15.3 55.88,16.62 ; U15.3 54.5,15.24 ; 25.92,53.34 U2.3 ; U2.3 27.3,54.72 ; U2.3 27.3,51.96 ; U2.3 28.69,53.34 ; U12.3 42.02,27.94 ; U12.3 40.64,26.56 ; U12.3 39.26,27.94 ; U12.3 40.64,29.32 ; U14.3 42.02,40.64 ; U14.3 40.64,39.26 ; U14.3 40.64,42.02 ; U14.3 39.26,40.64 ; U6.2 24.24,27.94 ; U6.2 22.86,26.56 ; U6.2 21.48,27.94 ; U6.2 22.86,29.32 ; U13.5 60.96,34.4 ; U13.5 62.34,33.02 ; U13.5 60.96,31.64 ; U13.5 59.58,33.02 ; U13.2 57.26,33.02 ; U13.2 55.88,34.4 ; U13.2 54.5,33.02 ; U13.2 55.88,31.64 ; 59.58,58.42 U9.5 ; U9.5 62.34,58.42 ; U9.5 60.96,59.8 ; U9.5 60.96,57.04 ; J1.3 24.13,7.94 ; J1.3 24.13,5.93 ; J1.3 25.14,6.93 ; U4.2 24.24,40.64 ; U4.2 21.48,40.64 ; U4.2 22.86,39.26 ; U4.2 22.86,42.02 ; 2.54,31.64 U3.2 ; U3.2 2.54,34.4 ; U3.2 3.92,33.02 ; U3.2 1.16,33.02 ; 21.48,20.32 U8.5 ; U8.5 22.86,18.94 ; U8.5 22.86,21.7 ; U8.5 24.24,20.32 ; U3.3 3.92,27.94 ; U3.3 2.54,26.56 ; U3.3 2.54,29.32 ; U3.3 1.16,27.94 ; U7.4 7.62,54.72 ; U7.4 9,53.34 ; U7.4 7.62,51.96 ; U7.4 6.24,53.34 ; U14.4 42.02,45.72 ; U14.4 40.64,47.1 ; U14.4 39.26,45.72 ; U14.4 40.64,44.34 ; 60.96,51.96 U9.4 ; U9.4 60.96,54.72 ; U9.4 59.58,53.34 ; U9.4 62.34,53.34 ; J2.3 46.99,7.94 ; J2.3 46.99,5.93 ; J2.3 48,6.93 ; 55.88,18.94 U15.2 ; U15.2 54.5,20.32 ; U15.2 55.88,21.7 ; U15.2 57.26,20.32
N17882: length 60.3
  TOP w0.145: U1.1 5.08,14.61 3.81,13.34 1.91,13.34 1.27,12.7 1.27,1.91 1.91,1.27 2.54,1.27 3.17,1.91 3.17,10.16 3.81,10.79 4.45,10.79 5.08,10.16 5.08,1.91 5.71,1.27 6.35,1.27 6.99,1.91 6.99,9.53 7.62,10.16 13.65,10.16 13.97,9.84 R4.2 J1.11
N17894: length 60.1
  TOP w0.145: J1.9 R3.2 16.51,9.75 15.24,11.02 15.24,12.06 14.61,12.7 11.43,12.7 10.16,13.97 10.16,22.23 9.53,22.86 3.17,22.86 2.54,23.5 2.54,24.77 3.17,25.4 9.53,25.4 10.16,26.04 10.16,34.29 10.16,36.83 9.55,37.47 5.71,37.47 5.08,36.83 U3.1
N17906: length 60.1
  TOP w0.145: J1.7 R2.2 19.05,9.76 17.78,11.03 17.78,12.7 16.51,13.97 13.34,13.97 12.06,15.24 12.06,48.89 10.79,50.16 6.98,50.16 5.08,48.26 U5.1
N17918: length 60.2
  TOP w0.145: U7.1 12.7,55.88 13.97,54.61 13.97,18.41 20.32,12.06 20.32,11.02 21.59,9.75 R1.2 J1.5
N17930: length 60.4
  BOTTOM w0.145: J1.12 15.24,5.66 15.24,7.78 14.04,8.98 R5.2 13.97,9.75 15.24,11.02 15.24,18.41 15.88,19.05 15.88,52.7 19.05,55.88 U2.1
N17948: length 60
  BOTTOM w0.145: J1.10 17.78,5.66 17.78,7.78 16.58,8.98 R6.2 16.51,9.75 17.78,11.02 17.78,48.9 18.41,49.53 24.77,49.53 25.4,48.9 U4.1
N17973: length 60.4
  BOTTOM w0.145: J1.8 20.4,5.75 20.4,7.7 19.12,8.98 R7.2 19.05,9.75 20.32,11.02 20.32,37.47 20.95,38.1 23.5,38.1 24.13,37.47 24.13,36.83 24.77,36.2 26.67,36.2 27.3,36.83 27.3,37.47 27.94,38.1 29.84,38.1 31.11,36.83 31.11,31.12 30.48,30.48 U6.1
N17998: length 60
  BOTTOM w0.145: U8.1 25.4,20.96 24.13,22.23 22.86,22.23 22.23,22.86 22.23,25.4 22.86,26.04 29.21,26.04 30.48,24.77 30.48,5.71 29.84,5.08 29.21,5.08 28.57,5.71 28.57,10.79 27.3,12.07 24.13,12.07 21.66,9.6 21.66,8.98 ; 21.66,8.98 22.86,7.78 22.86,5.66 J1.6 ; 21.66,8.98 R8.2
N19655: length 60.4
  TOP w0.145: U9.1 58.42,52.7 55.24,49.53 55.24,49.53 53.98,49.53 49.53,45.09 49.53,20.95 41.91,13.34 38.87,13.34 38.1,12.55 38.1,11.03 36.83,9.76 R12.2 J2.11
N19661: length 60.3
  TOP w0.145: J2.9 R11.2 39.37,9.75 40.64,11.02 40.64,12.06 41.28,12.7 42.55,12.7 43.81,13.97 47.62,13.97 48.26,14.61 48.26,17.78 48.9,18.41 49.53,18.41 50.16,17.78 50.16,14.4 50.6,13.97 51,13.97 51.44,14.4 51.44,42.55 52.07,43.18 U11.1
N19667: length 59.9
  TOP w0.145: J2.7 R10.2 41.91,9.75 43.18,11.02 43.18,12.07 43.81,12.7 52.71,12.7 53.34,13.33 53.34,37.46 53.98,38.1 61.59,38.1 62.23,37.47 62.23,36.19 61.6,35.56 59.05,35.56 58.42,34.92 U13.1
N19673: length 60
  TOP w0.145: J2.5 R9.2 44.45,9.75 45.5,10.79 52.07,10.79 52.7,10.16 52.7,2.54 53.34,1.91 55.24,1.91 55.88,2.54 55.88,8.89 56.52,9.53 58.42,9.53 59.05,8.89 59.05,2.54 59.69,1.91 61.59,1.91 62.23,2.54 62.23,10.16 58.42,13.97 U15.1
N19679: length 60.1
  BOTTOM w0.145: J2.12 38.1,5.66 38.1,7.78 36.9,8.98 R13.2 36.83,9.75 36.42,10.16 35.56,10.16 34.92,9.53 34.92,2.54 34.29,1.91 33.66,1.91 33.02,2.54 33.02,25.4 33.66,26.04 35.56,26.04 36.2,25.4 38.1,25.4 38.73,26.04 40.64,26.04 41.27,25.4 41.27,22.86 40.64,22.23 39.37,22.23 38.1,20.95 U10.1
N19687: length 60.4
  BOTTOM w0.145: J2.10 40.64,5.66 40.64,7.78 39.44,8.98 R14.2 39.37,9.75 40.64,11.02 40.64,12.06 43.18,14.61 43.18,36.83 42.55,37.47 40.01,37.47 39.37,36.83 39.37,35.56 38.73,34.92 37.47,34.92 36.83,35.56 36.83,36.83 36.2,37.47 33.66,37.47 33.02,36.83 33.02,31.11 33.65,30.48 U12.1
N19697: length 60.3
  BOTTOM w0.145: U14.1 38.1,46.35 36.95,47.5 36.95,48.38 38.1,49.53 38.73,49.53 40.64,47.62 44.45,47.62 45.09,46.99 45.09,13.97 43.18,12.06 43.18,11.02 41.91,9.75 R15.2 41.98,8.98 43.18,7.78 43.18,5.66 J2.8
N19707: length 60.3
  BOTTOM w0.145: J2.6 45.72,5.66 45.72,7.78 44.52,8.98 R16.2 44.45,9.75 46.99,12.29 46.99,48.26 45.72,49.53 40.64,49.53 38.1,52.07 U16.1

## Copper pours and planes (outline as drawn; the poured copper is in the pictures)
GND on TOP, BOTTOM, GND1, GND2: 0.51,0.51 0.51,60.45 62.99,60.45 62.99,0.51

## Text on the board
Ref Des/Silkscreen Bottom: 4321 | 8765
Ref Des/Silkscreen Top: JA8 | JA7 | JA6 | JA5 | 5678 | JA1 | JA2 | JA3 | JA4 | JB8 | JB7 | JB6 | JB5 | 1234 | JB1 | JB2 | JB3 | JB4
